# EAGLE board brd-relays3 (EAGLE 6.5.0)
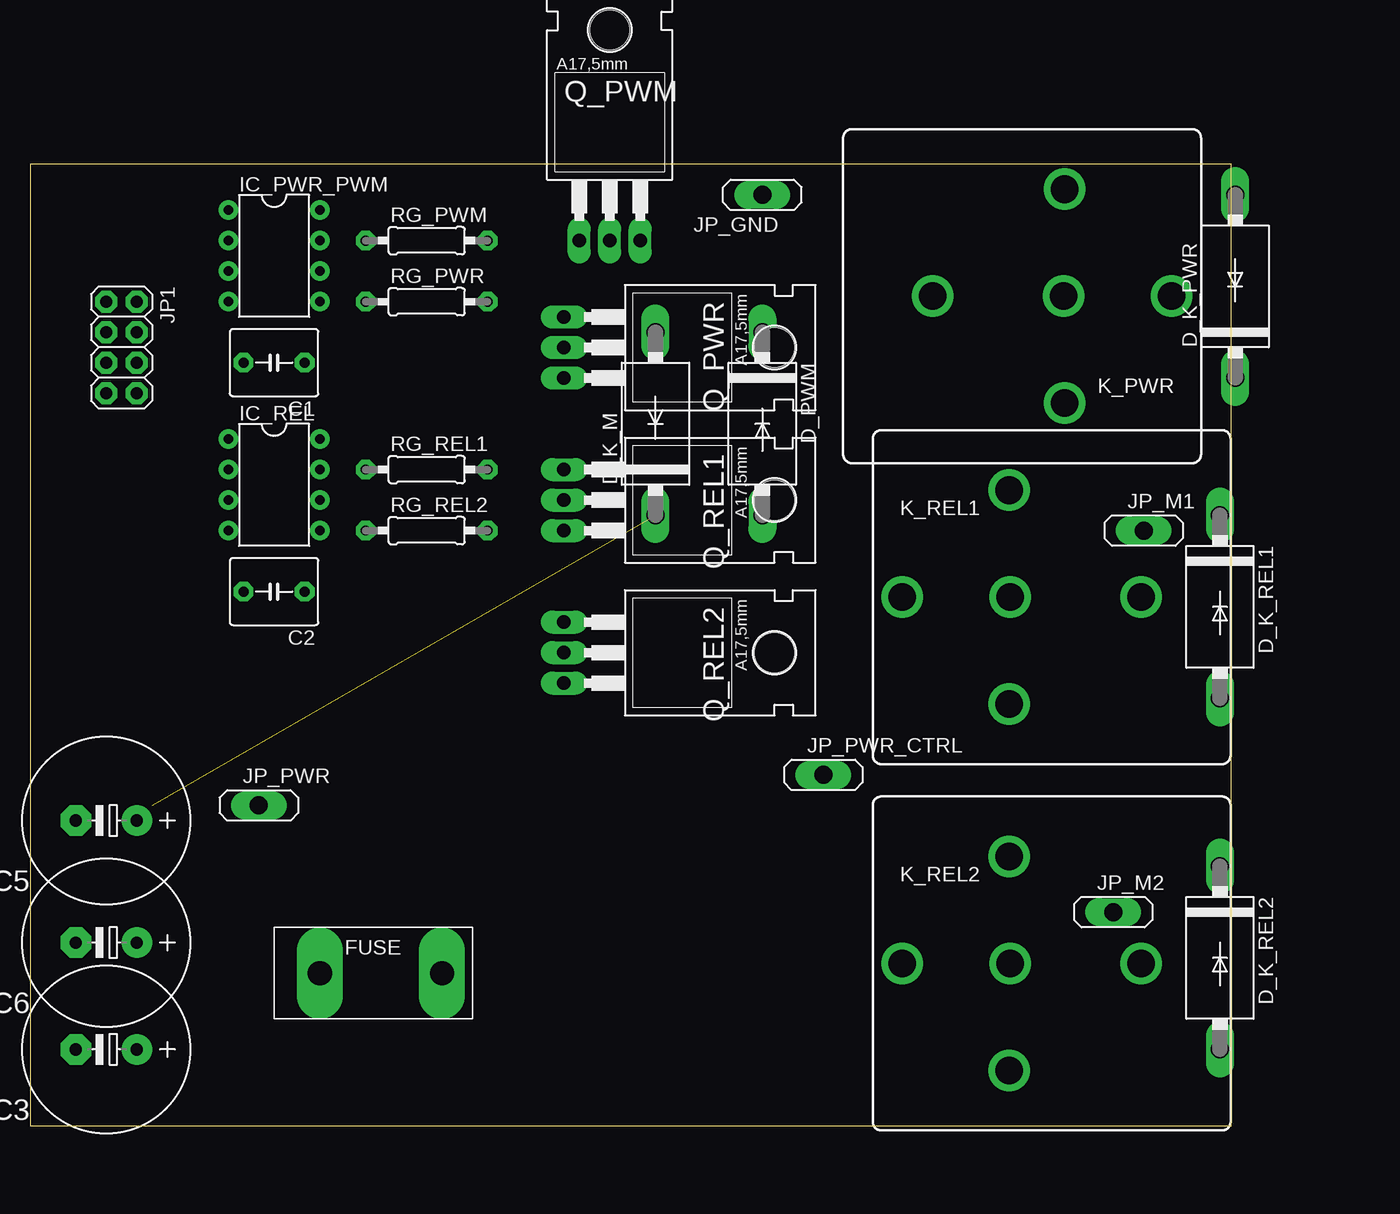
[diagram p0: board, top side]
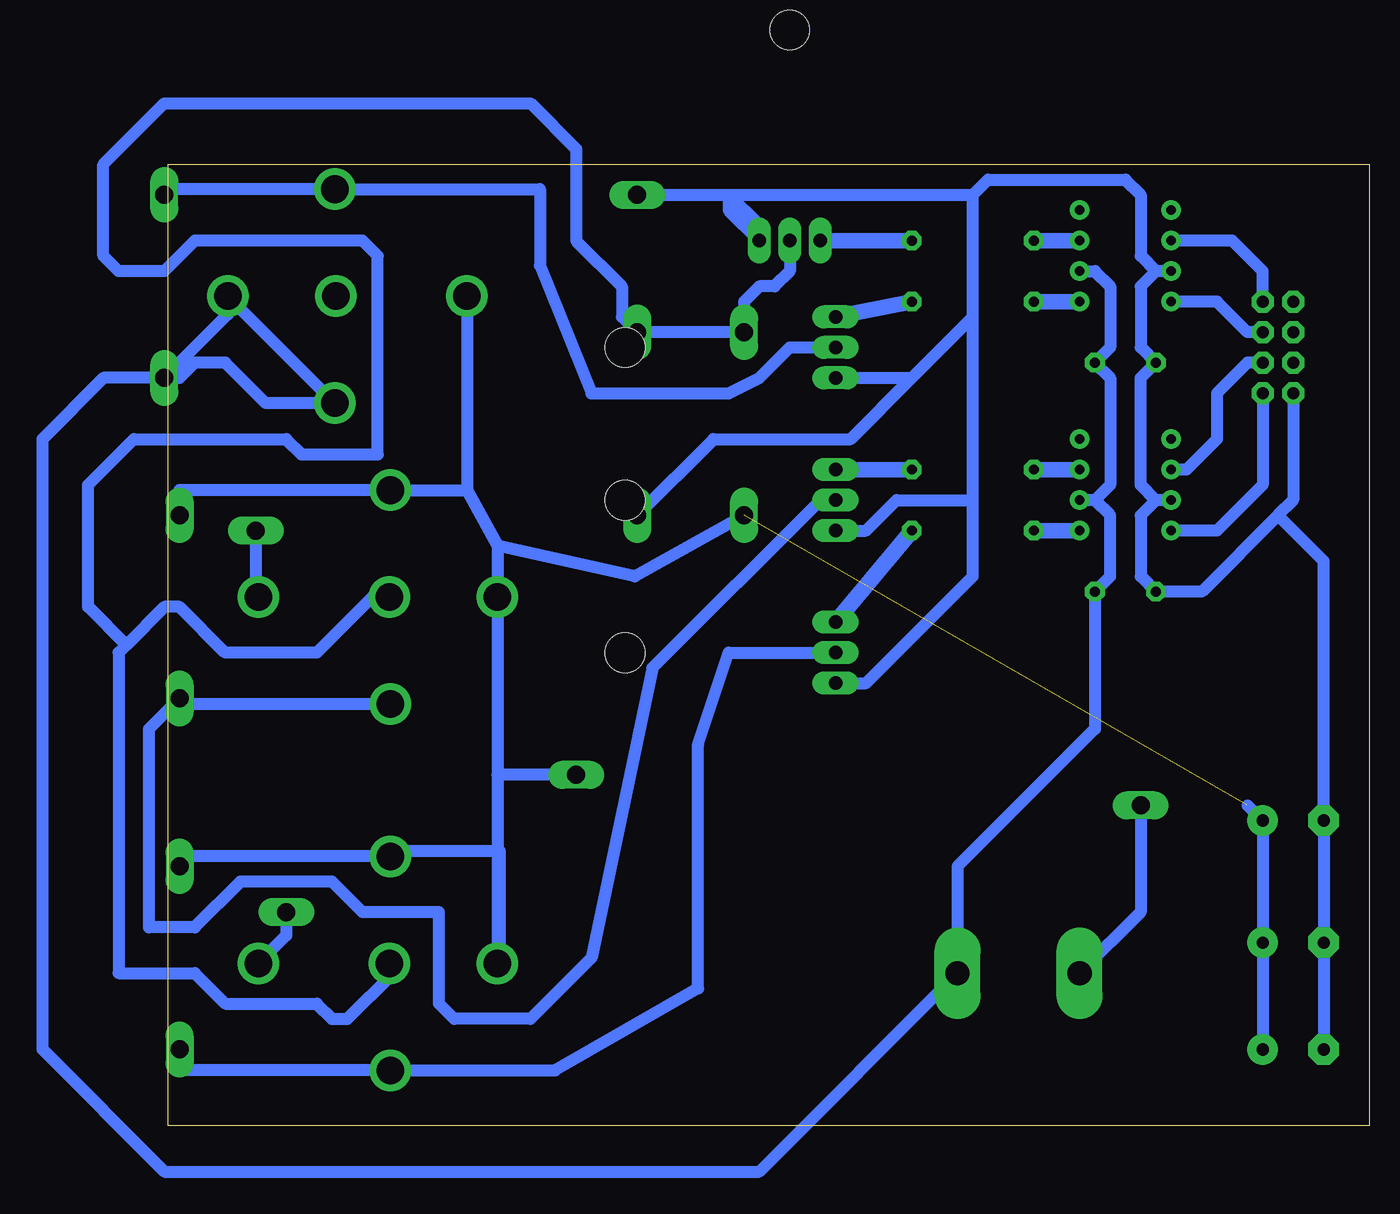
[diagram p1: board, bottom side, seen from below]

Size 100 x 80 mm. Coordinates in mm from the lower left corner, seen from the top.
Outline: 0,0 100,0 100,80 0,80 0,0
Copper layers (1*16): Top 0.035mm / dielectric 1.5mm / Bottom 0.035mm
Design rules "default": minimum track width 10mil, minimum drill 32mil, track to track 40mil, track to pad 40mil, pad to pad 40mil, via to via 40mil, smd to smd 12mil, copper to edge 40mil, drill to drill 40mil, minimum pad ring 16mil, minimum via ring 12mil, stop-mask expansion 4mil, vias tented up to drill 0mil, thermal gap 10mil

## Footprints (pad centres in the part's own frame; a part is rotated, then mirrored left to right if it is on the bottom)
C050-055X075 = drill 0.813 octagon: 1 -2.54,0; 2 2.54,0
E5-13 = drill 1.016 pad 2.54: + -2.54,0 | drill 1.016 pad 2.54 octagon: - 2.54,0
DO201-15 = drill 1.499 long: A 7.62,0; C -7.62,0
FUSE_PACK1 = drill 2 pad 3.81 long: 1 -5.08,0; 2 5.08,0
DIL08 = drill 0.8 pad 1.4: 1 -3.81,-3.81; 2 -1.27,-3.81; 3 1.27,-3.81; 4 3.81,-3.81; 5 3.81,3.81; 6 1.27,3.81; 7 -1.27,3.81; 8 -3.81,3.81
2X04 = drill 1.016 octagon: 1 -3.81,-1.27; 2 -3.81,1.27; 3 -1.27,-1.27; 4 -1.27,1.27; 5 1.27,-1.27; 6 1.27,1.27; 7 3.81,-1.27; 8 3.81,1.27
1X01 = drill 1.5 long: 1 0,0
CB1 = drill 2.3: 30 9.95,-3; 85 -1.05,-11.9; 86 -1.05,5.9; 87 -9.95,-3; 87A -0.95,-3
TO220BH = drill 1.118 pad 1.93 long: D 0,-6.35; G -2.54,-6.35; S 2.54,-6.35 | hole 3.302: 0,11.176
0207/10 = drill 0.813 octagon: 1 -5.08,0; 2 5.08,0

## Placement (x,y rotation side)
C1  [C050-055X075]  20.32,63.5 180 top
C2  [C050-055X075]  20.32,44.45 180 top
C3  [E5-13]  6.35,6.35 180 top
C5  [E5-13]  6.35,25.4 180 top
C6  [E5-13]  6.35,15.24 180 top
D_K_M  BY251  [DO201-15]  52.07,58.42 90 top
D_K_PWR  BY251  [DO201-15]  100.33,69.85 90 top
D_K_REL1  BY251  [DO201-15]  99.06,43.18 270 top
D_K_REL2  BY251  [DO201-15]  99.06,13.97 270 top
D_PWM  BY251  [DO201-15]  60.96,58.42 270 top
FUSE  [FUSE_PACK1]  29.21,12.7 0 top
IC_PWR_PWM  IR4427  [DIL08]  20.32,72.39 270 top
IC_REL  IR4427  [DIL08]  20.32,53.34 270 top
JP1  [2X04]  7.62,64.77 270 top
JP_GND  [1X01]  60.96,77.47 180 top
JP_M1  [1X01]  92.71,49.53 0 top
JP_M2  [1X01]  90.17,17.78 0 top
JP_PWR  [1X01]  19.05,26.67 0 top
JP_PWR_CTRL  [1X01]  66.04,29.21 0 top
K_PWR  CB1-P-12V  [CB1]  85.09,66.04 180 top
K_REL1  CB1-P-12V  [CB1]  82.55,46.99 0 top
K_REL2  CB1-P-12V  [CB1]  82.55,16.51 0 top
Q_PWM  IRLZ44Z  [TO220BH]  48.26,80.01 0 top
Q_PWR  IRLZ44Z  [TO220BH]  50.8,64.77 270 top
Q_REL1  IRLZ44Z  [TO220BH]  50.8,52.07 270 top
Q_REL2  IRLZ44Z  [TO220BH]  50.8,39.37 270 top
RG_PWM  [0207/10]  33.02,73.66 0 top
RG_PWR  [0207/10]  33.02,68.58 0 top
RG_REL1  [0207/10]  33.02,54.61 0 top
RG_REL2  [0207/10]  33.02,49.53 0 top

## Library data of the parts
C1-C3 C5 C6 RG_PWM RG_PWR RG_REL1 RG_REL2 = rcl
D_K_M D_K_PWR D_K_REL1 D_K_REL2 D_PWM = diode
FUSE JP_GND JP_M1 JP_M2 JP_PWR JP_PWR_CTRL Q_PWM Q_PWR Q_REL1 Q_REL2 = dbg-misc
IC_PWR_PWM IC_REL = ir; MF: INTERNATIONAL RECTIFIER(IR); MPN: IR4427; OC_FARNELL: 1023267; OC_NEWARK: 27C6914
JP1 = pinhead
K_PWR K_REL1 K_REL2 = dbg-misc; MF: AROMAT/ MATSUSHITA; MPN: CB1-P-12V; OC_FARNELL: unknown; OC_NEWARK: 52F9201

## Nets
GND: C1.2 C2.2 C3.- C5.- C6.- D_PWM.A IC_PWR_PWM.3 IC_REL.3 JP1.7 JP_GND.1 Q_PWM.S Q_PWR.S Q_REL1.S Q_REL2.S
N$1: FUSE.1 JP_PWR.1
N$2: JP_M2.1 K_REL2.30
N$3: IC_PWR_PWM.7 RG_PWM.1
N$4: IC_PWR_PWM.5 RG_PWR.1
N$5: Q_PWM.G RG_PWM.2
N$6: Q_PWR.G RG_PWR.2
N$7: IC_REL.7 RG_REL1.1
N$8: Q_REL1.G RG_REL1.2
N$9: IC_REL.5 RG_REL2.1
N$10: Q_REL2.G RG_REL2.2
N$11: IC_REL.2 JP1.6
N$12: IC_REL.4 JP1.8
N$13: IC_PWR_PWM.2 JP1.2
N$16: D_K_PWR.A K_PWR.85 Q_PWR.D
N$17: IC_PWR_PWM.4 JP1.4
N$18: JP_M1.1 K_REL1.30
N$19: D_K_REL1.A K_REL1.85 Q_REL1.D
N$20: D_K_REL2.A K_REL2.85 Q_REL2.D
N$22: D_K_M.A D_PWM.C K_REL1.87A K_REL2.87A Q_PWM.D
N$24: C3.+ C5.+ C6.+ D_K_M.C D_K_REL1.C D_K_REL2.C JP_PWR_CTRL.1 K_PWR.30 K_REL1.86 K_REL1.87 K_REL2.86 K_REL2.87
VCC: C1.1 C2.1 D_K_PWR.C FUSE.2 IC_PWR_PWM.6 IC_REL.6 K_PWR.86 K_PWR.87

## Tracks (layer width: path | path; a pad name or v marks a point on that pad's centre or on a via)
GND
  Bottom 1.016: JP1.7 6.35,52.07 7.62,50.8 | 7.62,50.8 13.97,44.45 C2.2 19.05,45.72 19.05,50.8 17.78,52.07 | IC_REL.3 17.78,52.07 | 17.78,52.07 19.05,53.34 19.05,62.23 C1.2 19.05,64.77 19.05,69.85 17.78,71.12 | IC_PWR_PWM.3 17.78,71.12 | Q_PWR.S 38.1,62.23 | 38.1,62.23 33.02,67.31 | 33.02,67.31 33.02,77.47 | 33.02,77.47 31.75,78.74 20.32,78.74 19.05,77.47 19.05,72.39 17.78,71.12 | Q_REL1.S 41.91,49.53 39.37,52.07 33.02,52.07 | 33.02,52.07 33.02,67.31 | Q_REL2.S 41.91,36.83 33.02,45.72 33.02,52.07 | JP_GND.1 53.34,77.47 | 53.34,77.47 53.34,76.2 Q_PWM.S 50.8,74.93 53.34,77.47 | 53.34,77.47 33.02,77.47 | C3.- C6.- C5.- 3.81,46.99 7.62,50.8 | D_PWM.A 54.61,57.15 43.18,57.15 38.1,62.23
N$1
  Bottom 1.016: JP_PWR.1 19.05,17.78 FUSE.1
N$2
  Bottom 1.016: JP_M2.1 90.17,15.84 K_REL2.30
N$3
  Bottom 1.27: IC_PWR_PWM.7 RG_PWM.1
N$4
  Bottom 1.27: IC_PWR_PWM.5 RG_PWR.1
N$5
  Bottom 1.27: RG_PWM.2 Q_PWM.G
N$6
  Bottom 1.27: RG_PWR.2 Q_PWR.G
N$7
  Bottom 1.27: IC_REL.7 RG_REL1.1
N$8
  Bottom 1.27: RG_REL1.2 Q_REL1.G
N$9
  Bottom 1.27: IC_REL.5 RG_REL2.1
N$10
  Bottom 1.27: RG_REL2.2 Q_REL2.G
N$11
  Bottom 1.016: JP1.6 10.16,63.5 12.7,60.96 12.7,57.15 15.24,54.61 IC_REL.2
N$12
  Bottom 1.016: JP1.8 8.89,53.34 12.7,49.53 IC_REL.4
N$13
  Bottom 1.016: JP1.2 8.89,71.12 11.43,73.66 IC_PWR_PWM.2
N$16
  Bottom 1.016: D_K_PWR.A 99.86,77.94 K_PWR.85 69.05,77.94 69.05,71.59 64.77,60.96 53.34,60.96 50.8,62.23 48.26,64.77 Q_PWR.D
N$17
  Bottom 1.016: JP1.4 10.16,66.04 12.7,68.58 IC_PWR_PWM.4
N$18
  Bottom 1.016: JP_M1.1 92.71,44.2 K_REL1.30
N$19
  Bottom 1.016: K_REL1.85 99.06,35.09 D_K_REL1.A 101.6,33.02 101.6,16.51 97.79,16.51 93.98,20.32 86.36,20.32 83.82,17.78 77.47,17.78 77.47,10.16 76.2,8.89 69.85,8.89 64.77,13.97 59.69,38.1 45.72,52.07 Q_REL1.D
N$20
  Bottom 1.016: D_K_REL2.A 99.06,4.61 K_REL2.85 67.78,4.61 55.88,11.43 55.88,31.75 53.34,39.37 Q_REL2.D
N$22
  Bottom 1.016: K_REL1.87A 83.01,43.99 87.63,39.37 95.25,39.37 99.06,43.18 100.33,43.18 103.5,40.01 | 103.5,40.01 104.14,39.37 104.14,12.7 97.79,12.7 95.25,10.16 87.63,10.16 86.36,8.89 85.09,8.89 81.28,12.7 81.28,13.19 K_REL2.87A | 103.5,40.01 106.68,43.18 106.68,53.34 102.87,57.15 90.17,57.15 88.9,55.88 82.55,55.88 82.55,72.39 83.82,73.66 97.79,73.66 100.33,71.12 104.14,71.12 105.41,72.39 105.41,80.01 100.33,85.09 69.85,85.09 66.04,81.28 66.04,73.66 62.23,69.85 62.23,67.31 D_PWM.C D_K_M.A 52.07,68.58 50.8,69.85 49.53,69.85 48.26,71.12 Q_PWM.D
N$24  (1 unrouted)
  Bottom 1.016: K_PWR.30 75.14,52.89 | 75.14,52.89 72.6,48.26 | 72.6,48.26 K_REL1.87 72.6,29.21 | 72.6,29.21 K_REL2.87 72.39,13.51 72.39,22.86 81.5,22.86 K_REL2.86 99.06,22.41 D_K_REL2.C | 75.14,52.89 K_REL1.86 99.06,52.89 D_K_REL1.C | 10.16,26.67 C5.+ C6.+ C3.+ | D_K_M.C 61.17,45.72 72.6,48.26 | JP_PWR_CTRL.1 72.6,29.21
VCC
  Bottom 1.016: IC_PWR_PWM.6 22.86,71.12 21.59,69.85 21.59,64.77 C1.1 21.59,62.23 21.59,53.34 22.86,52.07 | 22.86,52.07 IC_REL.6 | 22.86,52.07 21.59,50.8 21.59,45.72 C2.1 22.86,33.02 34.29,21.59 FUSE.2 50.8,-3.81 100.33,-3.81 110.49,6.35 110.49,57.15 105.41,62.23 99.06,62.23 97.79,63.5 95.25,63.5 91.89,60.14 K_PWR.86 K_PWR.87 95.04,67.52 D_K_PWR.C